# Altium PCB GNSS_FE.PcbDoc
Units mm, origin at the board's own origin, x right, y up, seen from the top; angles counter-clockwise.
Board outline 87 x 30 mm, 4 copper layers (TOP, GND, POWER, BOTTOM), stack 1.586 mm thick; 33 components, 20 nets, 105 pads, 407 vias.
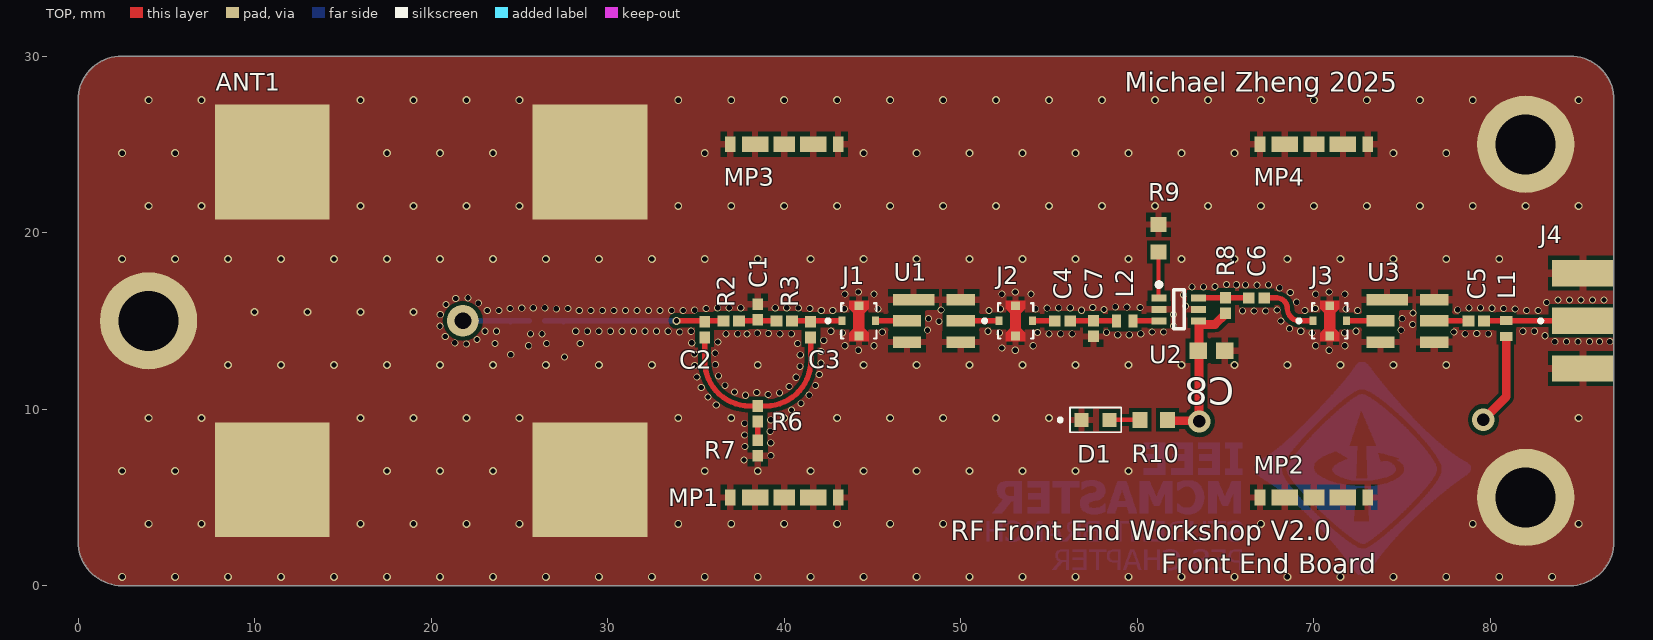
[diagram p0: TOP view]
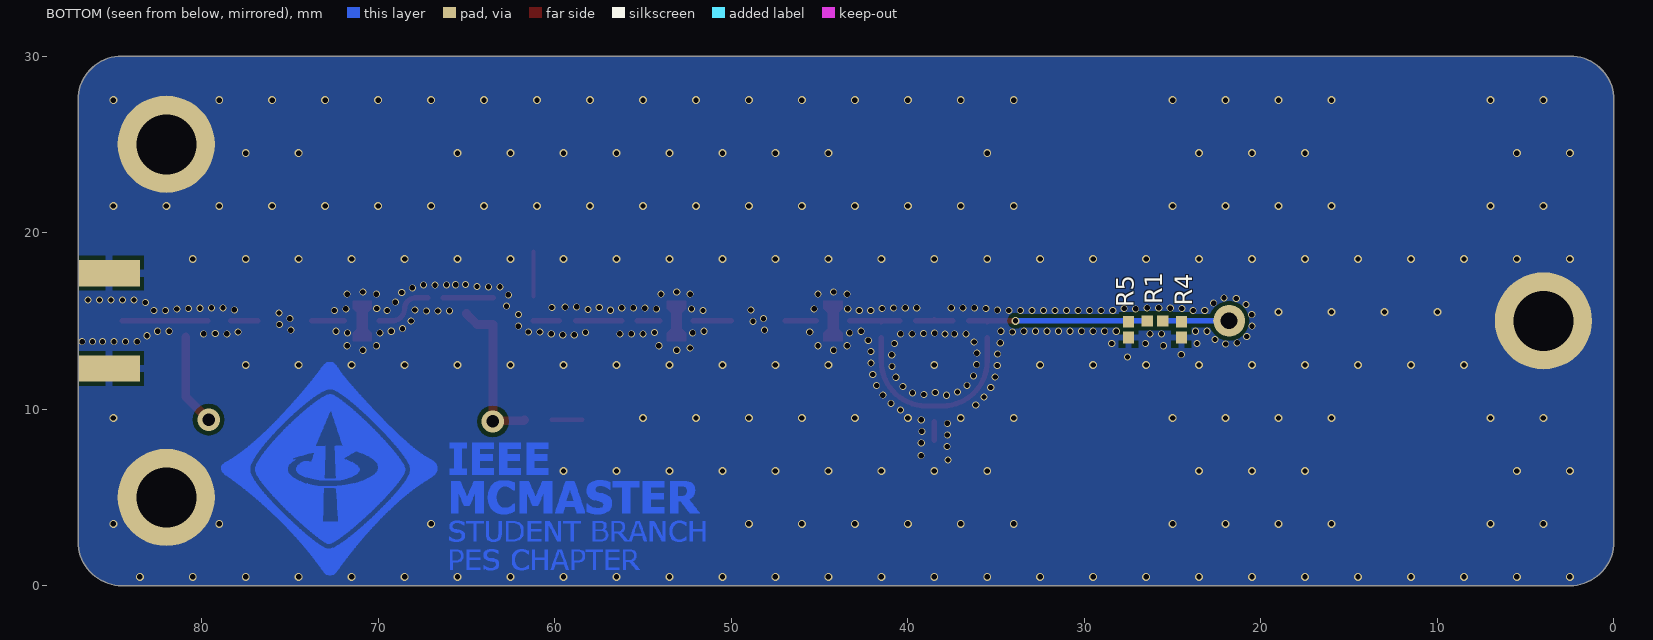
[diagram p1: BOTTOM view, seen from below]
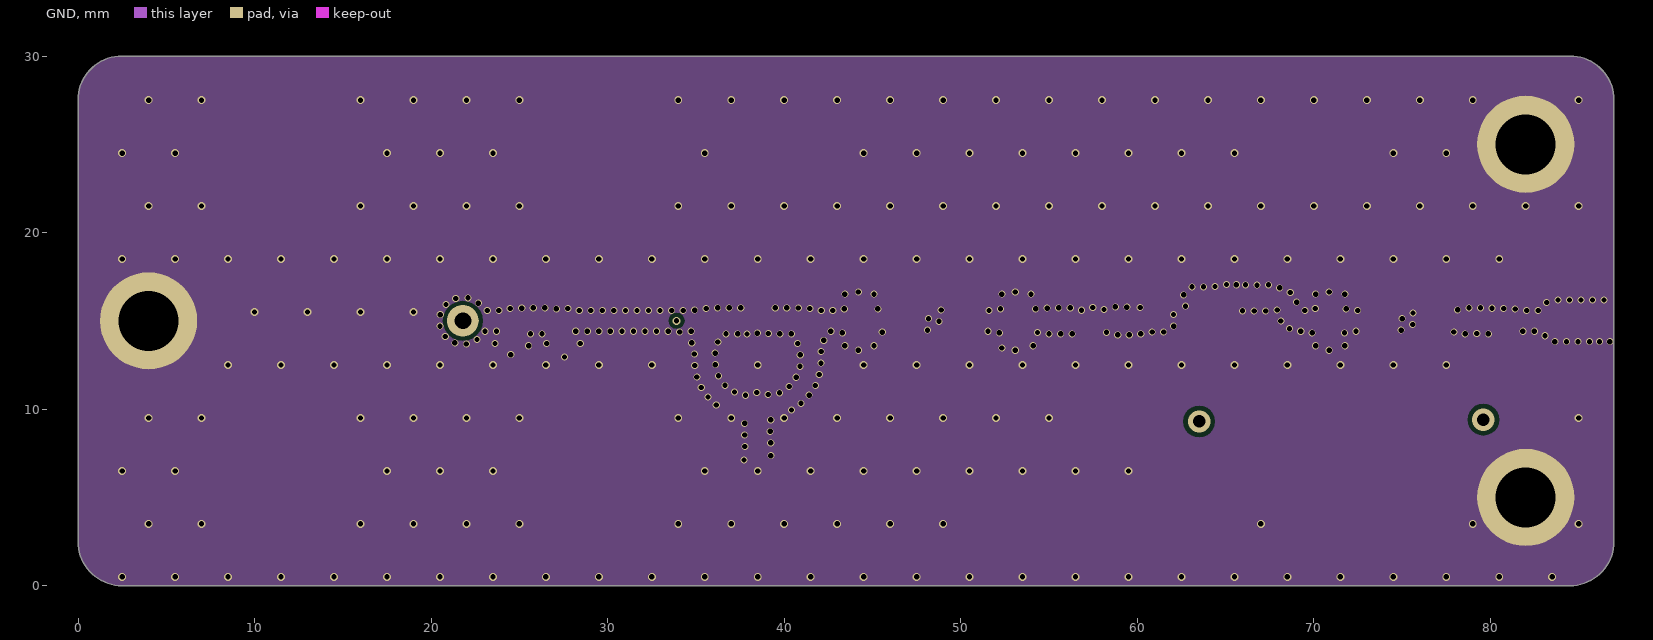
[diagram p2: GND]
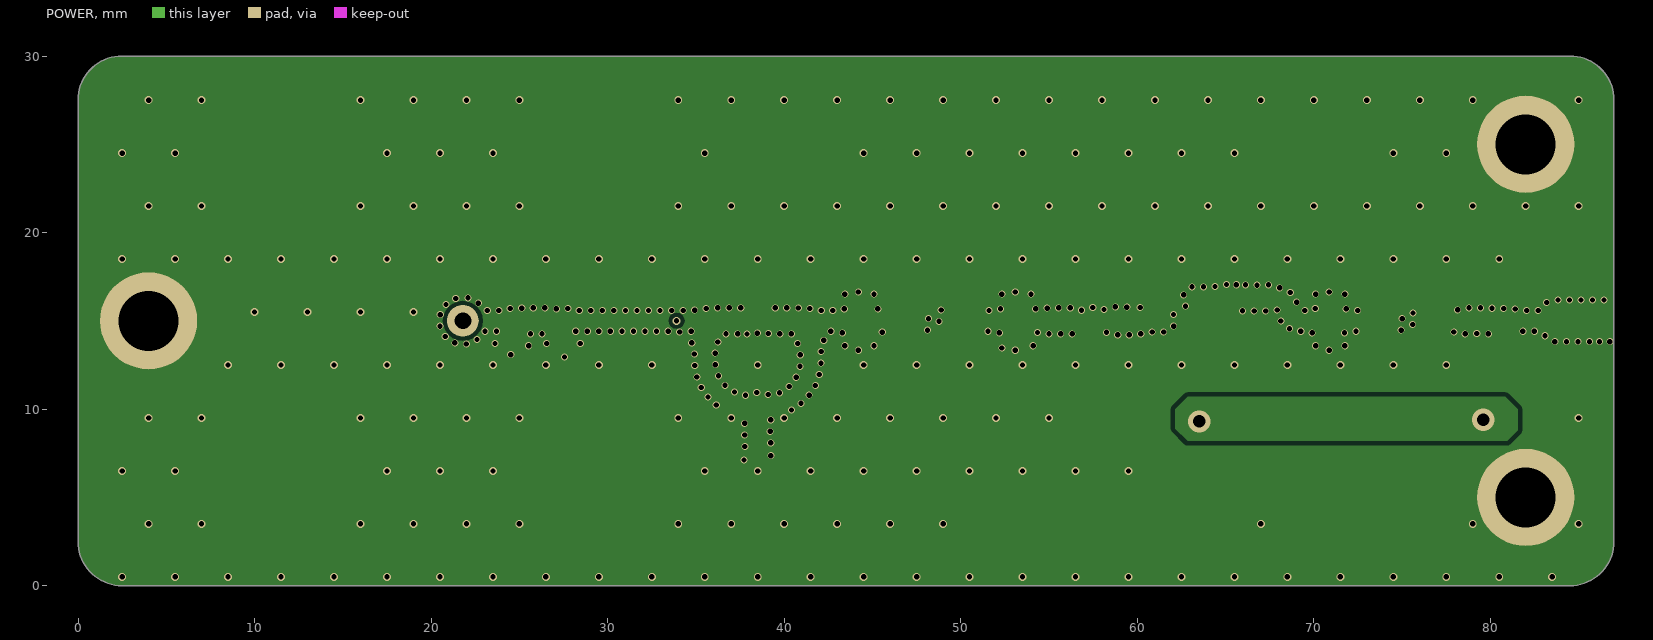
[diagram p3: POWER]
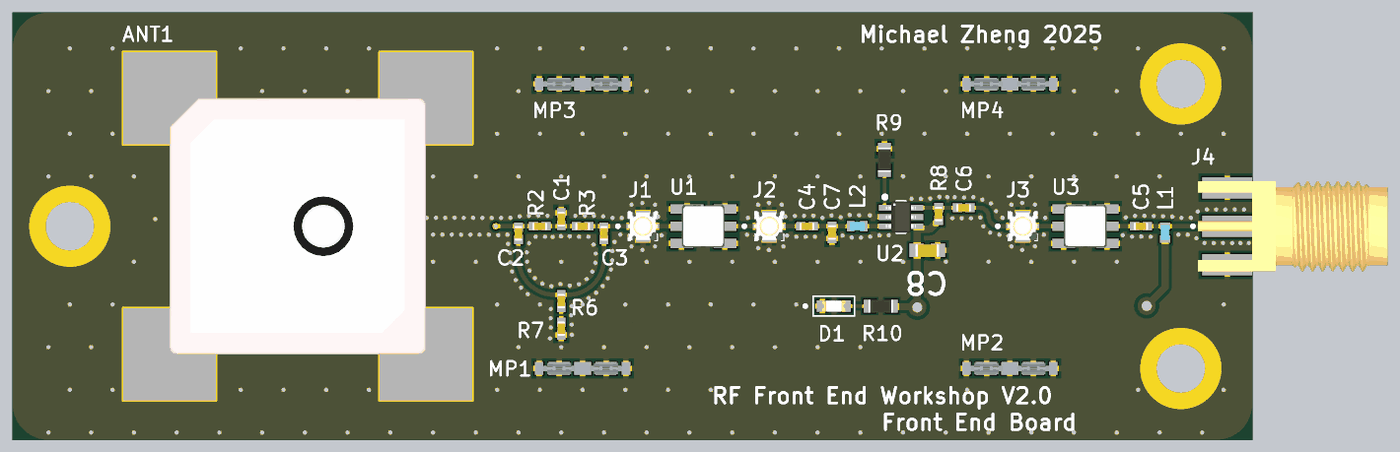
[diagram p4: 3D render of the assembled board from above, using the file's embedded part models]
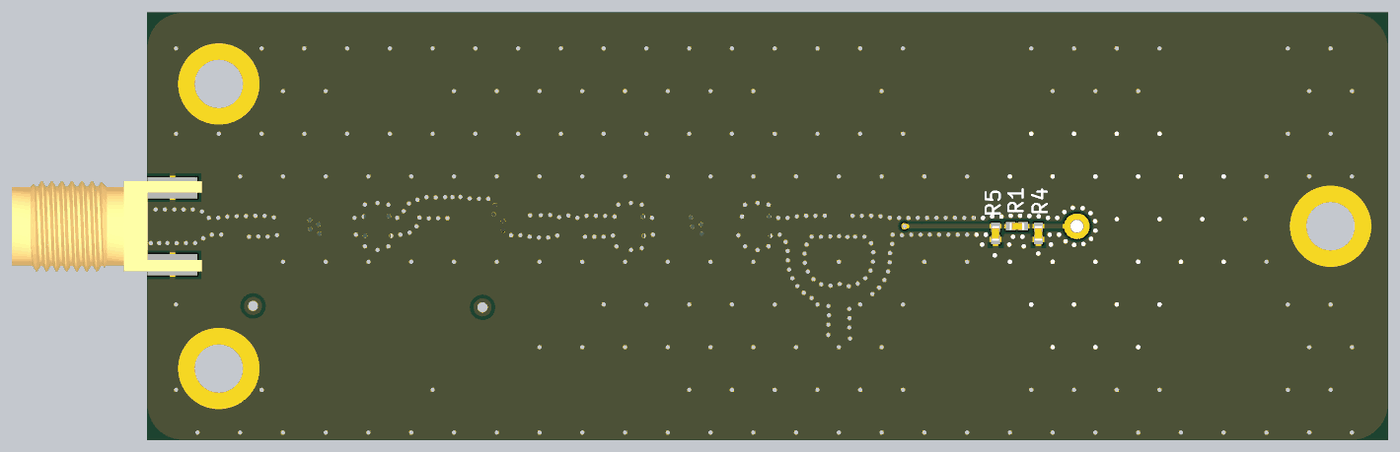
[diagram p5: 3D render of the assembled board from below, using the file's embedded part models]

## Layer stack, top to bottom
Top Solder: solder mask 0.0305, Solder Resist, Dk 3.8
TOP: signal copper 0.035
Dielectric 2: prepreg 0.2104, Core-024, Dk 4.4
GND: signal copper 0.0152
Dielectric 1: core 1.065, Core-024, Dk 4.6
POWER: signal copper 0.0152
Dielectric 3: prepreg 0.2104, Core-024, Dk 4.4
BOTTOM: signal copper 0.035
Bottom Solder: solder mask 0.0305, Solder Resist, Dk 3.8

## Board outline
0,2.5 0,27.5 cw(c2.5,27.5) 2.5,30 84.5,30 cw(c84.5,27.5) 87,27.5 87,2.5 cw(c84.5,2.5) 84.5,0 2.5,0 cw(c2.5,2.5)

## Design rules (kind name [scope] priority, off if disabled: settings)
AssemblyTestpoint [All] p1: testpointundercomponent=TRUE minsize=1.016 maxsize=2.54 preferedsize=1.524 minholesize=0 maxholesize=1.016 preferedholesize=0.813 testpointgrid=0.025 usegrid=TRUE gridoriginx=3.5 gridoriginy=45.5 gridtolerance=0 allowsidetop=TRUE allowsidebottom=TRUE
Clearance Clearance_1 [InNetClass('RF')] p1: gap=0.22 ignorepadtopadclearanceinfootprint=FALSE
Clearance Clearance_3 [(OnLayer('Keep-Out Layer'))] p2: gap=0 ignorepadtopadclearanceinfootprint=FALSE
Clearance Clearance_1 [(ExistsOnLayer('GND') Or ExistsOnLayer('POWER')) vs (ExistsOnLayer('GND') Or ExistsOnLayer('POWER'))] p3: gap=0.2 ignorepadtopadclearanceinfootprint=FALSE except(0.1: Arc-SMDPad Track-SMDPad SMDPad-Text; 0.15: SMDPad-SMDPad; 0.25: Arc-Arc Arc-Track Arc-Text Arc-Hole Track-Track Track-Text Track-Hole Text-Text Text-Hole; 0.254: THPad-THPad THPad-Via THPad-Fill THPad-Poly THPad-Region THPad-Hole Via-Via Via-Fill Via-Poly Via-Region Via-Hole Fill-Fill Fill-Poly Fill-Region Fill-Hole Poly-Poly Poly-Region Poly-Hole Region-Region Region-Hole Hole-Hole) sourcerule=44 cellrowname=All cellrowtype=0 cellcolname=All cellcoltype=0 innerlayers=TRUE
Clearance Clearance_2 [(ExistsOnLayer('TOP') Or ExistsOnLayer('BOTTOM')) vs (ExistsOnLayer('TOP') Or ExistsOnLayer('BOTTOM'))] p4: gap=0.2 ignorepadtopadclearanceinfootprint=FALSE except(0.1: Arc-SMDPad Track-SMDPad SMDPad-Text; 0.15: SMDPad-SMDPad; 0.25: Arc-Arc Arc-Track Arc-Text Arc-Hole Track-Track Track-Text Track-Hole Text-Text Text-Hole; 0.254: THPad-THPad THPad-Via THPad-Fill THPad-Poly THPad-Region THPad-Hole Via-Via Via-Fill Via-Poly Via-Region Via-Hole Fill-Fill Fill-Poly Fill-Region Fill-Hole Poly-Poly Poly-Region Poly-Hole Region-Region Region-Hole Hole-Hole) sourcerule=44 cellrowname=All cellrowtype=0 cellcolname=All cellcoltype=0 outerlayers=TRUE
Clearance [All] p5: gap=0.254 ignorepadtopadclearanceinfootprint=FALSE ismatrix=TRUE
FabricationTestpoint [All] p1: side=3 testpointundercomponent=TRUE minsize=1.016 maxsize=2.54 preferedsize=1.524 minholesize=0 maxholesize=1.016 preferedholesize=0.813 testpointgrid=0.025 allowsidetop=TRUE allowsidebottom=TRUE usegrid=TRUE gridoriginx=3.5 gridoriginy=45.5 gridtolerance=0
HoleSize [All] p1: absolutevalues=TRUE maxlimit=6 minlimit=0.025 maxpercent=80.000 minpercent=20.000
HoleToHoleClearance HoleToHoleClearance_Via [IsVia vs IsVia] p1: gap=0.2 allowstackedmicrovias=FALSE
HoleToHoleClearance [All] p2: gap=0.254 allowstackedmicrovias=TRUE
MinimumSolderMaskSliver [All] p1: minsoldermaskwidth=0.05
PolygonConnect PolygonConnectStyle_1 [InComponent('ANT1') vs InNet('GND')] p1: connectstyle=Direct reliefconductorwidth=0.254 reliefentries=2 polygonreliefangle="0 Angle" airgapwidth=0.254
PolygonConnect [All] p2: thpad.connectstyle=Relief thpad.reliefconductorwidth=0.381 thpad.reliefentries=4 thpad.polygonreliefangle="90 Angle" thpad.airgapwidth=0.254 thpad.conductorbypadedge=TRUE thpad.mindistance=0.381 thpad.enablemindistance=FALSE smdpad.connectstyle=Relief smdpad.reliefconductorwidth=0.381 smdpad.reliefentries=4 smdpad.polygonreliefangle="90 Angle" smdpad.airgapwidth=0.254 smdpad.conductorbypadedge=TRUE smdpad.mindistance=0.381 smdpad.enablemindistance=FALSE via.connectstyle=Direct via.reliefconductorwidth=0.254 via.reliefentries=4 via.polygonreliefangle="90 Angle" via.airgapwidth=0.254
RoutingVias RoutingViaStyle_1 [InNet('VCC')] p1: holewidth=0.711 width=1.27 viastyle="Through Hole" minholewidth=0.711 minwidth=1.27 maxholewidth=0.711 maxwidth=1.27
RoutingVias [All] p2: holewidth=0.3 width=0.45 viastyle="Through Hole" minholewidth=0.3 minwidth=0.4 maxholewidth=0.3 maxwidth=0.45
SilkToSilkClearance [All] p1: silktosilkclearance=0.15
SilkToSolderMaskClearance [IsPad] p1: minsilkscreentomaskgap=0.15 clearancetoexposedcopper=TRUE
SolderMaskExpansion [All] p1: expansion=0.102 istentingtop=FALSE
Width MaxMinWidth_3 [InNet('GND')] p1: maxlimit=0.64 minlimit=0.254 preferedwidth=0.254 minimp=50.000000 maximp=50.000000 favimp=50.000000
Width MaxMinWidth_2 [InNet('VCC')] p2: maxlimit=0.5 minlimit=0.254 preferedwidth=0.254 minimp=50.000000 maximp=50.000000 favimp=50.000000
Width MaxMinWidth_1 [InNetClass('RF')] p3: maxlimit=0.3 minlimit=0.181 preferedwidth=0.3 toplayer_minwidth=0.3 midlayer1_maxwidth=0.181 midlayer1_prefwidth=0.181 midlayer2_maxwidth=0.181 midlayer2_prefwidth=0.181 bottomlayer_minwidth=0.3 impedanceprofiledriven=TRUE impedanceprofileid={EA114435-6167-4238-A230-E0D83EAAED20} impedanceprofilevalue=50.000000 minimp=50.000000 maximp=50.000000 favimp=50.000000
Width [All] p4: maxlimit=0.254 minlimit=0.254 preferedwidth=0.254
23 further rules are at their usual default settings.

## Classes and differential pairs
net class RF: NetANT1_1 NetC1_1 NetC2_1 NetC2_2 NetC3_2 NetC4_1 NetC4_2 NetC5_1 NetC5_2 NetC6_1 NetC6_2 NetJ1_2 NetJ2_1 NetJ3_2 NetL2_1 NetR6_2

## Components (designator, comment, footprint, x,y, rotation, side; value= is the part's Value field where it differs from the comment)
ANT1 "ANT-GNSSCP-TH18L1" ANT-GNSSCP-TH18L1 20,15 r90 top
C1 "GRM1555C1H102JA01D" 0402_CAP 38.5,15.5 r90 top
C2 "GRM1555C1H102JA01D" 0402_CAP 35.5,14.5 r90 top
C3 "GRM1555C1H102JA01D" 0402_CAP 41.5,14.5 r90 top
C4 "GRM1555C1H182JA01D" 0402_CAP 55.76,15 r0 top
C5 "GJM1555C1H8R1BB01D" 0402_CAP 79.2,15 r0 top
C6 "GJM1555C1H470FB01D" 0402_CAP 66.754,16.3 r0 top
C7 "GJM1555C1H1R5WB01D" 0402_CAP 57.514,14.56 r90 top
C8 "GCM188L81H104KA57D" CAP_MURATA_0603 64.2,13.3 r180 top
D1 "Red, 2V, 140°" WL-SMCW 57.635,9.387 r0 top
J1 "MM8030-2610RJ3" MURATA_MM8030-2610RJ3 44.229,15 r90 top
J2 "MM8030-2610RJ3" MURATA_MM8030-2610RJ3 53.106,15 r90 top
J3 "MM8030-2610RJ3" MURATA_MM8030-2610RJ3 70.9,15 r90 top
J4 "CON-SMA-EDGE-S" RFSOLUTIONS_CON-SMA-EDGE-S 85.25,15 r180 top
L1 "LQW15AN20NG8ZD" INDC1006X60N 80.9,14.56 r270 top value=20nH
L2 "LQW15AN3N6C10D" INDC1006X60N 59.284,15 r180 top value=5.6nH
MP1 "36900000" 36900000 40,5 r180 top locked
MP2 "36900000" 36900000 70,5 r180 top
MP3 "36900000" 36900000 40,25 r180 top
MP4 "36900000" 36900000 70,25 r180 top
R1 "RC0402JR-070RL" 0402_CAP 26,15 r180 bottom
R2 "RC0402JR-070RL" 0402_CAP 37,15 r180 top
R3 "RC0402JR-070RL" 0402_CAP 40,15 r180 top
R4 "RC0402JR-070RL" 0402_CAP 24.5,14.5 r90 bottom
R5 "RC0402JR-070RL" 0402_CAP 27.5,14.5 r90 bottom
R6 "RC0402JR-070RL" 0402_CAP 38.5,9.74 r270 top
R7 "RC0402JR-070RL" 0402_CAP 38.5,7.8 r270 top
R8 "RC0402FR-0710KL" 0402_CAP 65,15.86 r90 top
R9 "RC0402FR-07357RL" RC0603JR-070RL 61.2,19.675 r90 top
R10 "RC0603JR-070RL" RC0603JR-070RL 60.937,9.387 r180 top
U1 "B39162B3913U410" B39162B3913U410 48.475,15 r270 top
U2 "MAX2655EXT+T" MAX2655EXT+T 62.353,15.65 r0 top
U3 "B39162B3913U410" B39162B3913U410 75.3,15 r270 top

## Footprints (in the part's own frame and the unit in brackets; to place one, negate y for a bottom-side part, rotate by r counter-clockwise, add the part's x,y. Pads: shape width x height; smd on the part's side, far side on the other; paste and mask are expansions set on the pad)
0402_CAP [mm]
  rect 0.66x0.62 smd: 1(-0.44,0) 2(0.44,0)
  body extent -0.53,-0.28 0.53,0.28, height 0.55
36900000 [mm] "Shielding Cabinet Clip"
  rect 0.6x0.9 smd: 1(-3.05,0) 1(3.05,0)
  rect 1.5x0.9 smd: 1(-1.65,0) 1(1.65,0)
  rect 1.2x0.9 smd: 1(0,0)
  body extent -3.25,-0.41 3.25,0.41, height 1.28
ANT-GNSSCP-TH18L1 [mm]
  round 1.8 hole 0.95: 1(0,-1.8)
  rect 6.5x6.5 smd: 2(-9,-9) 2(-9,9) 2(9,-9) 2(9,9)
  body extent -9,-9 9,9, height 4.1
B39162B3913U410 [mm]
  rect 0.65x2.35 smd: 1(-1.2,-1.15)
  rect 0.65x1.6 smd: 2(0,-1.525) 3(1.2,-1.525) 4(1.2,1.525) 5(0,1.525) 6(-1.2,1.525)
  body extent -1.5,-1.5 1.5,1.5, height 1.1
CAP_MURATA_0603 [mm]
  rect 1x0.95 smd: 1(-0.75,0) 2(0.75,0)
  body extent -0.85,-0.45 0.85,0.45, height 0.9
INDC1006X60N [mm]
  rect 0.51x0.73 smd: 1(-0.46,0) 2(0.46,0)
  body extent -0.5,-0.3 0.5,0.3, height 0.6
MAX2655EXT+T [mm] "TSOP, 6-Leads, Body 2.00x1.25mm, Pitch 0.65mm, IPC Medium Density"
  rect 0.85x0.4 smd: 1(-1.125,0.65) 2(-1.125,0) 3(-1.125,-0.65) 4(1.125,-0.65) 5(1.125,0) 6(1.125,0.65)
  silkscreen extent -1.25,-1.1 0.3,1.52, body extent -1.05,-1.1 1.05,1.1, height 1.1
MURATA_MM8030-2610RJ3 [mm]
  rect 0.5x0.4 smd paste-1 mask+0: 1(0,0.95) 2(0,-0.95)
  rect 0.5x0.5 smd paste-1 mask+0: 3(-0.85,0) 4(0.85,0)
  TOP region: 1.15,-0.55 0.68,-0.55 0.45,-0.32 0.45,0.32 0.68,0.55 1.15,0.55
  TOP region: -0.45,0.32 -0.45,-0.32 -0.68,-0.55 -1.15,-0.55 -1.15,0.55 -0.68,0.55
  silkscreen extent -1,-1 1,1.85, body extent -1,-1.05 1,1.05, height 0.9
RC0603JR-070RL [mm] "Chip Resistor, 2-Leads, Body 1.60x0.80mm, IPC Medium Density"
  rect 0.85x0.9 smd: 1(-0.775,0) 2(0.775,0)
  body extent -0.85,-0.45 0.85,0.45, height 0.55
RFSOLUTIONS_CON-SMA-EDGE-S [mm]
  rect 3.5x1.5 smd: 1(0,0) 2(0,2.7) 2(0,-2.7)
  rect 3.5x1.5 smd far side: 2(0,2.7) 2(0,-2.7)
  silkscreen extent 2.3,-0.1 2.5,0.1, body extent -11.27,-3.18 2.06,3.18, height 3.55
WL-SMCW [mm]
  rect 0.8x0.8 smd: 1(-0.8,0) 2(0.8,0)
  silkscreen extent -2.07,-0.7 1.45,0.7, body extent -0.8,-0.4 0.8,0.4, height 0.7

## Part data
ANT1: "CERAMIC PATCH GNSS ANTENNA"
C1 C2 C3: "CAP CER 1000PF 50V C0G/NP0 0402", Capacitance=1uF
C4: library part GRM1555C1H102JA01D, "CAP CER 1800PF 50V C0G/NP0 0402", Capacitance=1800pF
C5: library part GRM1555C1H102JA01D, "CAP CER 8.1PF 50V C0G/NP0 0402", Capacitance=8.1pF
C6: library part GRM1555C1H102JA01D, "CAP CER 47PF 50V C0G/NP0 0402", Capacitance=47pF
C7: library part GRM1555C1H102JA01D, "CAP CER 1.5PF 50V C0G/NP0 0402", Capacitance=1.5pF
C8: "CAP CER 0.1UF 50V X8L 0603", Capacitance=0.1uF
D1: library part 150060RS75000, "WL-SMCW Mono-color Chip LED Waterclear, SMT, size 0603, Red, 2V, 140°", Case/Size Code=0603, Emitting Color=Red, Forward Voltage=2V, Manufacturer="Wurth Elektronik", Operating Temperature Max=85°C, Operating Temperature Min=-40°C, Category="Signal LEDs", Chip Technology=AlInGaP, ComponentLink1Description="Website Link", ComponentLink1URL=https://www.we-online.com/redexpert/article/150060RS75000?ad, ComponentLink2Description="Datasheet Link", ComponentLink2URL=https://www.we-online.com/redexpert/spec/150060RS75000?ad, Dominant Wavelength=625nm, Height=0.7mm, Length=1.6mm, Luminous Intensity=250mcd, Manufacturer Part Number=150060RS75000, Match Code=WL-SMCW, Mount="Surface Mount", Packaging="Tape and Reel", Peak Wavelength=630nm, Viewing Angle=140°, Width=0.8mm
J1 J2 J3: "SWG Connector Receptacle, Female Socket 50Ohm Surface Mount Solder", Package=None, Digi-Key_Part_Number=490-5907-1-ND, Digi-Key_Purchase_URL=https://www.digikey.com/product-detail/en/murata-electronics/MM8030-2610RJ3/490-5907-1-ND/3635133?utm_source=snapeda&utm_medium=aggregator&utm_campaign=symbol, MF=Murata, MP=MM8030-2610RJ3, SnapEDA_Link=https://www.snapeda.com/parts/MM8030-2610RJ3/Murata%20Electronics%20North%20America/view-part/271470/?ref=snap
J4: "CONN SMA JACK STR EDGE MNT"
L1: library part LQW15AN3N6C10D, "FIXED IND 20NH 800MA 0.186OHM SM", Package=None, Availability=Unavailable, MP=LQW15AN3N6C10D, Price=None
L2: "FIXED IND 3.6NH 900MA 40 MOHM", Package=None, Availability=Unavailable, MP=LQW15AN3N6C10D, Price=None
MP1 MP2 MP3 MP4: "WE-SHC Shielding Cabinet, Clip, Tin Plated, Tape and Reel, 6.5x0.8x1.27mm", Manufacturer="Wurth Elektronik", Operating Temperature Max=125°C, Operating Temperature Min=-40°C, Base Material=Steel, Category="EMC Shielding", ComponentLink1Description="Website Link", ComponentLink1URL=https://www.we-online.com/redexpert/article/36900000?ad, ComponentLink2Description="Datasheet Link", ComponentLink2URL=https://www.we-online.com/redexpert/spec/36900000?ad, Height=1.27mm, Length=6.5mm, Manufacturer Part Number=36900000, Match Code=WE-SHC, Mount="Surface Mount", Packaging="Tape and Reel", Plating="Tin Plated", Type=Clip, Width=0.8mm
R1 R2 R3 R4 R5 R6 R7: "RES 0 OHM JUMPER 1/16W 0402", Case Code (Imperial)=0603, Case Code (Metric)=1608, Manufacturer=Yageo, Max Operating Temperature=155degC, Min Operating Temperature=-55degC, Package Description="2-Pin Surface Mount Device, Body 1.6 x 0.8 mm", Package Quantity=5000, Power Rating=100mW, Resistance=0mOhm, Temperature Coefficient=200ppm/degreesC, Tolerance=5%, Voltage Rating=50V, Case/Package=0603, Composition=ThickFilm, Contact Plating=Tin, Datasheet URL=http://www.yageo.com/NewPortal/yageodocoutput?fileName=/pdf/R-Chip/PYu-RC_Group_51_RoHS_L_5.pdf, Datasheet Version="Rev. 5, 10/2016", Depth=0.8mm, Height=0.45mm, Lead Free=LeadFree, Length=1.6mm, Manufacturer URL=http://www.yageo.com/, Military Standard=Not, Number of Pins=2, Package Reference=0603, Packaging=TapeandReel, Radiation Hardening=No, REACH SVHC=NoSVHC, RoHSCompliant=true, Termination=SMD/SMT, Voltage Rating (DC)=50V, Width=0.8mm
R8: library part RC0402JR-070RL, "RES 10K OHM 1% 1/16W 0402", Case Code (Imperial)=0603, Case Code (Metric)=1608, Manufacturer=Yageo, Max Operating Temperature=155degC, Min Operating Temperature=-55degC, Package Description="2-Pin Surface Mount Device, Body 1.6 x 0.8 mm", Package Quantity=5000, Power Rating=100mW, Resistance=10kΩ, Temperature Coefficient=200ppm/degreesC, Tolerance=5%, Voltage Rating=50V, Case/Package=0603, Composition=ThickFilm, Contact Plating=Tin, Datasheet URL=http://www.yageo.com/NewPortal/yageodocoutput?fileName=/pdf/R-Chip/PYu-RC_Group_51_RoHS_L_5.pdf, Datasheet Version="Rev. 5, 10/2016", Depth=0.8mm, Height=0.45mm, Lead Free=LeadFree, Length=1.6mm, Manufacturer URL=http://www.yageo.com/, Military Standard=Not, Number of Pins=2, Package Reference=0603, Packaging=TapeandReel, Radiation Hardening=No, REACH SVHC=NoSVHC, RoHSCompliant=true, Termination=SMD/SMT, Voltage Rating (DC)=50V, Width=0.8mm
R9: library part RC0603JR-070RL, "RES 357 OHM 1% 1/16W 0402", Case Code (Imperial)=0603, Case Code (Metric)=1608, Manufacturer=Yageo, Max Operating Temperature=155degC, Min Operating Temperature=-55degC, Package Description="2-Pin Surface Mount Device, Body 1.6 x 0.8 mm", Package Quantity=5000, Power Rating=100mW, Resistance=357Ω, Temperature Coefficient=200ppm/degreesC, Tolerance=5%, Voltage Rating=50V, Case/Package=0603, Composition=ThickFilm, Contact Plating=Tin, Datasheet URL=http://www.yageo.com/NewPortal/yageodocoutput?fileName=/pdf/R-Chip/PYu-RC_Group_51_RoHS_L_5.pdf, Datasheet Version="Rev. 5, 10/2016", Depth=0.8mm, Height=0.45mm, Lead Free=LeadFree, Length=1.6mm, Manufacturer URL=http://www.yageo.com/, Military Standard=Not, Number of Pins=2, Package Reference=0603, Packaging=TapeandReel, Radiation Hardening=No, REACH SVHC=NoSVHC, RoHSCompliant=true, Termination=SMD/SMT, Voltage Rating (DC)=50V, Width=0.8mm
R10: "Chip Resistor, 0 Ohm, +/- 5%, 0.1 W, -55 to 155 degC, 0603 (1608 Metric), RoHS, Tape and Reel", Case Code (Imperial)=0603, Case Code (Metric)=1608, Manufacturer=Yageo, Max Operating Temperature=155degC, Min Operating Temperature=-55degC, Package Description="2-Pin Surface Mount Device, Body 1.6 x 0.8 mm", Package Quantity=5000, Power Rating=100mW, Resistance=0mOhm, Temperature Coefficient=200ppm/degreesC, Tolerance=5%, Voltage Rating=50V, Case/Package=0603, Composition=ThickFilm, Contact Plating=Tin, Datasheet URL=http://www.yageo.com/NewPortal/yageodocoutput?fileName=/pdf/R-Chip/PYu-RC_Group_51_RoHS_L_5.pdf, Datasheet Version="Rev. 5, 10/2016", Depth=0.8mm, Height=0.45mm, Lead Free=LeadFree, Length=1.6mm, Manufacturer URL=http://www.yageo.com/, Military Standard=Not, Number of Pins=2, Package Reference=0603, Packaging=TapeandReel, Radiation Hardening=No, REACH SVHC=NoSVHC, RoHSCompliant=true, Termination=SMD/SMT, Voltage Rating (DC)=50V, Width=0.8mm
U1 U3: "FILTER SAW 1.588GHZ 6SMD"
U2: "IC AMP GPS 1.4GHZ-1.7GHZ SC70-6"

## Free pads (board coordinates)
  round 5.5 hole 3.4: ""(4,15) ""(82,5) ""(82,25)

## Via types
v1: diameter 0.4, hole 0.3, TOP to BOTTOM, 216 vias
v2: diameter 0.45, hole 0.3, TOP to BOTTOM, tented both sides, 188 vias
v3: diameter 1.27, hole 0.711, TOP to BOTTOM, tented both sides, 2 vias
v4: diameter 0.45, hole 0.3, TOP to BOTTOM, 1 vias

## Nets (pads, with @x,y where several pads share a name; then routed paths per layer and width w, separated by ;. In a path a pad name is that pad's centre, name@x,y a point inside that pad or via, vN(x,y) a via of type N, cw(c..) or ccw(c..) an arc to the next point about the centre after c; other vN are vias at no path point)
GND: ANT1.2 C1.2 C7.1 C8.1 D1.1 J1.3 J1.4 J2.3 J2.4 J3.3 J3.4 J4.2 MP1.1 MP2.1 MP3.1 MP4.1 pad. R4.1 R5.1 R7.2 R9.2 U1.1 U1.3 U1.4 U1.6 U2.2 U2.5 U3.1 U3.3 U3.4 U3.6 | length 2.7
  TOP w0.64: 44.229,14.55 44.229,15.45 ; 53.106,14.55 53.106,15.45 ; 70.9,14.55 70.9,15.45
  other v1: 37.719,7.112 39.243,7.366 37.767,7.884 39.238,8.087 37.762,8.538 39.202,8.74 37.762,9.192 39.238,9.393 40.416,9.955 36.151,10.232 40.956,10.324 35.678,10.684 37.809,10.784 41.413,10.791 39.089,10.829 38.444,10.938 39.736,10.925 37.181,10.969 35.303,11.219 40.282,11.284 36.647,11.346 41.765,11.343 40.68,11.803 35.049,11.822 36.276,11.885 41.984,11.959 40.889,12.423 34.932,12.465 36.102,12.515 42.079,12.606 27.559,12.954 24.511,13.081 40.909,13.076 34.909,13.119 36.091,13.169 42.091,13.26 44.196,13.335 53.086,13.335 70.866,13.335 52.324,13.462 25.527,13.589 43.434,13.589 45.085,13.589 54.102,13.589 70.104,13.589 71.755,13.589 21.995,13.686 23.622,13.716 26.543,13.716 28.448,13.716 40.765,13.714 21.344,13.751 34.762,13.756 36.238,13.806 83.653,13.822 84.307,13.822 84.961,13.822 85.615,13.822 86.182,13.818 86.766,13.818 42.238,13.897 22.598,13.938 20.803,14.118 83.091,14.156 58.891,14.207 59.545,14.207 25.624,14.262 26.278,14.262 36.707,14.262 37.361,14.262 37.897,14.249 39.753,14.262 40.407,14.262 55.001,14.262 55.655,14.263 56.309,14.262 60.197,14.262 78.573,14.262 79.88,14.262 39.1,14.288 79.226,14.278 38.481,14.3 43.292,14.322 52.186,14.322 54.352,14.341 69.905,14.322 71.74,14.322 45.553,14.361 58.253,14.351 34.077,14.37 60.841,14.372 61.495,14.372 77.928,14.373 23.052,14.409 23.706,14.409 28.192,14.409 28.846,14.409 29.5,14.409 30.154,14.409 30.808,14.409 31.462,14.409 32.116,14.409 32.77,14.409 33.424,14.409 34.73,14.409 42.644,14.409 51.537,14.409 69.257,14.409 72.388,14.409 81.834,14.409 82.488,14.409 48.119,14.471 74.944,14.471 68.619,14.557 20.502,14.699 62.061,14.7 75.597,14.787 48.772,14.972 68.132,14.993 48.178,15.122 75.003,15.122 20.518,15.353 62.051,15.354 75.62,15.441 66.616,15.562 67.27,15.562 65.962,15.566 23.18,15.591 23.834,15.591 28.391,15.591 29.045,15.591 29.699,15.591 30.353,15.591 31.007,15.591 31.661,15.591 32.315,15.591 32.969,15.591 33.623,15.591 34.277,15.591 34.93,15.602 42.097,15.591 42.751,15.591 51.605,15.591 56.841,15.6 67.922,15.612 69.487,15.591 72.478,15.591 82.05,15.591 82.704,15.591 48.889,15.615 58.119,15.638 78.143,15.624 27.092,15.679 43.399,15.678 45.303,15.678 52.253,15.678 54.241,15.678 71.83,15.678 81.402,15.676 24.479,15.698 27.746,15.698 35.577,15.698 41.452,15.698 70.079,15.697 80.095,15.713 80.749,15.703 25.133,15.719 25.787,15.738 26.441,15.738 36.23,15.738 36.884,15.738 37.538,15.738 39.491,15.738 40.145,15.738 40.799,15.732 54.894,15.719 55.548,15.738 56.202,15.738 78.787,15.738 79.441,15.738 57.476,15.758 60.162,15.761 59.408,15.777 58.754,15.793 62.729,15.829 20.84,15.922 22.673,16.004 83.185,16.034 69.027,16.056 83.823,16.178 84.477,16.178 85.131,16.178 85.785,16.178 86.439,16.178 21.394,16.27 22.091,16.301 62.625,16.475 43.434,16.51 45.085,16.51 52.324,16.51 53.975,16.51 70.104,16.51 71.755,16.51 68.663,16.599 44.196,16.637 53.086,16.637 70.866,16.637 68.066,16.866 63.096,16.928 63.75,16.928 64.404,16.944 66.782,17.022 65.048,17.058 65.608,17.043 66.128,17.038 67.435,17.038
  other v2: 2.5,0.5 5.5,0.5 8.5,0.5 11.5,0.5 14.5,0.5 17.5,0.5 20.5,0.5 23.5,0.5 26.5,0.5 29.5,0.5 32.5,0.5 35.5,0.5 38.5,0.5 41.5,0.5 44.5,0.5 47.5,0.5 50.5,0.5 53.5,0.5 56.5,0.5 59.5,0.5 62.5,0.5 65.5,0.5 68.5,0.5 71.5,0.5 74.5,0.5 77.5,0.5 80.5,0.5 83.5,0.5 4,3.5 7,3.5 16,3.5 19,3.5 22,3.5 25,3.5 34,3.5 37,3.5 40,3.5 43,3.5 46,3.5 49,3.5 67,3.5 79,3.5 85,3.5 2.5,6.5 5.5,6.5 17.5,6.5 20.5,6.5 23.5,6.5 35.5,6.5 38.5,6.5 41.5,6.5 44.5,6.5 47.5,6.5 50.5,6.5 53.5,6.5 56.5,6.5 59.5,6.5 4,9.5 7,9.5 16,9.5 19,9.5 22,9.5 25,9.5 34,9.5 37,9.5 40,9.5 43,9.5 46,9.5 49,9.5 52,9.5 55,9.5 85,9.5 8.5,12.5 11.5,12.5 14.5,12.5 17.5,12.5 20.5,12.5 23.5,12.5 26.5,12.5 29.5,12.5 32.5,12.5 38.5,12.5 44.5,12.5 47.5,12.5 50.5,12.5 53.5,12.5 56.5,12.5 59.5,12.5 62.5,12.5 65.5,12.5 68.5,12.5 71.5,12.5 74.5,12.5 77.5,12.5 10,15.5 13,15.5 16,15.5 19,15.5 2.5,18.5 5.5,18.5 8.5,18.5 11.5,18.5 14.5,18.5 17.5,18.5 20.5,18.5 23.5,18.5 26.5,18.5 29.5,18.5 32.5,18.5 35.5,18.5 38.5,18.5 41.5,18.5 44.5,18.5 47.5,18.5 50.5,18.5 53.5,18.5 56.5,18.5 59.5,18.5 62.5,18.5 65.5,18.5 68.5,18.5 71.5,18.5 74.5,18.5 77.5,18.5 80.5,18.5 4,21.5 7,21.5 16,21.5 19,21.5 22,21.5 25,21.5 34,21.5 37,21.5 40,21.5 43,21.5 46,21.5 49,21.5 52,21.5 55,21.5 58,21.5 61,21.5 64,21.5 67,21.5 70,21.5 73,21.5 76,21.5 79,21.5 82,21.5 85,21.5 2.5,24.5 5.5,24.5 17.5,24.5 20.5,24.5 23.5,24.5 35.5,24.5 44.5,24.5 47.5,24.5 50.5,24.5 53.5,24.5 56.5,24.5 59.5,24.5 62.5,24.5 65.5,24.5 74.5,24.5 77.5,24.5 4,27.5 7,27.5 16,27.5 19,27.5 22,27.5 25,27.5 34,27.5 37,27.5 40,27.5 43,27.5 46,27.5 49,27.5 52,27.5 55,27.5 58,27.5 61,27.5 64,27.5 67,27.5 70,27.5 73,27.5 76,27.5 79,27.5 85,27.5
NetANT1_1: ANT1.1 R1.2 R4.2 | length 3.8
  BOTTOM w0.3: ANT1.1 24.44,15 R4.2 24.56,15 R1.2
NetC1_1: C1.1 R2.1 R3.2 | length 2.2
  TOP w0.3: R2.1 38.44,15 C1.1 38.56,15 R3.2
NetC2_1: C2.1 C3.1 R6.1 | length 11.6
  TOP w0.3: C2.1 35.5,12.72 ccw(c38.04,12.72) 38.04,10.18 R6.1 38.96,10.18 ccw(c38.96,12.72) 41.5,12.72 C3.1
NetC2_2: C2.2 R1.1 R2.2 R5.2 | length 10.2
  TOP w0.3: v4(33.9,15) 35.44,15 C2.2 35.56,15 R2.2
  BOTTOM w0.3: R1.1 27.44,15 R5.2 27.56,15 v4(33.9,15)
NetC3_2: C3.2 J1.1 R3.1 | length 2.9
  TOP w0.3: R3.1 41.44,15 cw(c41.44,14.94) C3.2 cw(c41.56,14.94) 41.56,15 J1.1
NetC4_1: C4.1 J2.2 | length 1.3
  TOP w0.3: J2.2 C4.1
NetC4_2: C4.2 C7.2 L2.2 | length 2.6
  TOP w0.3: C4.2 C7.2 L2.2
NetC5_1: C5.1 U3.5 | length 1.5
  TOP w0.3: U3.5 78.36,15
NetC5_2: C5.2 J4.1 L1.1 | length 4.9
  TOP w0.3: C5.2 80.8,15 J4.1@84.5,15
NetC6_1: C6.1 R8.2 U2.6 | length 2.8
  TOP w0.3: U2.6 R8.2 C6.1
NetC6_2: C6.2 J3.1 | length 3.5
  TOP w0.3: C6.2 67.9,16.3 cw(c67.9,15.7) 68.5,15.7 ccw(c69.2,15.7) 69.2,15 J3.1
NetD1_2: D1.2 R10.2 | length 1.7
  TOP w0.254: D1.2 R10.2
NetJ1_2: J1.2 U1.2 | length 1.8
  TOP w0.3: J1.2 U1.2
NetJ2_1: J2.1 U1.5 | length 2.2
  TOP w0.3: U1.5 J2.1
NetJ3_2: J3.2 U3.2 | length 1.9
  TOP w0.3: J3.2@71.91,15 U3.2
NetL2_1: L2.1 U2.3 | length 1.5
  TOP w0.3: L2.1 U2.3
NetR6_2: R6.2 R7.1 | length 1.1
  TOP w0.3: R7.1 R6.2
NetR9_1: R9.1 U2.1 | length 2.5
  TOP w0.254: U2.1@61.2,16.4 R9.1
VCC: C8.2 L1.2 R8.1 R10.1 U2.4 | length 14.3
  TOP w0.5: R10.1 61.756,9.343 63.456,9.343 v3@63.489,9.311 ; v3(63.5,9.3) v3@63.489,9.311 ; R8.1 65,15.4 64.4,14.8 63.489,14.8 v3@63.489,9.311 ; v3(79.6,9.4) 80.9,10.7 L1.2

## Polygon pours and split planes (outlines as drawn)
GND on POWER "POWER-GND" (solid, pour order 6): 0,2.5 0,27.5 cw(c2.5,27.5) 2.5,30 84.5,30 cw(c84.5,27.5) 87,27.5 87,2.5 cw(c84.5,2.5) 84.5,0 2.5,0 cw(c2.5,2.5)
VCC on POWER "VCC_L03_P005" (solid, pour order 5): 62.149,8.9 62.149,10 62.849,10.7 80.849,10.7 81.549,10 81.549,8.8 80.949,8.2 62.849,8.2
GND on GND "GND-GND" (solid, pour order 8): 0,2.5 0,27.5 cw(c2.5,27.5) 2.5,30 84.5,30 cw(c84.5,27.5) 87,27.5 87,2.5 cw(c84.5,2.5) 84.5,0 2.5,0 cw(c2.5,2.5)
GND on TOP "GND-GND" (solid, pour order 9): 0,2.5 0,27.5 cw(c2.5,27.5) 2.5,30 84.5,30 cw(c84.5,27.5) 87,27.5 87,2.5 cw(c84.5,2.5) 84.5,0 2.5,0 cw(c2.5,2.5)
GND on BOTTOM "BOTTOM-GND" (solid, pour order 7): 0,2.5 0,27.5 cw(c2.5,27.5) 2.5,30 84.5,30 cw(c84.5,27.5) 87,27.5 87,2.5 cw(c84.5,2.5) 84.5,0 2.5,0 cw(c2.5,2.5)

## Other copper
BOTTOM:
  drawing of 37 lines, arcs and shapes, not listed

## Silkscreen, mask and mechanical layers (free items; w line width, h text height)
Top Overlay:
  text "Michael Zheng 2025" at 59.3,27.967 h1.1
  text "RF Front End Workshop V2.0" at 49.442,2.567 h1.1
  text "Front End Board" at 61.355,0.7 h1.1
Mechanical 1:
  lines w0.254: 0,0 87,0 87,30 0,30 0,0
Bottom Designator:
  text "String" at 30.246,5.262 h1.52